# EAGLE board Proyecto01 (EAGLE 9.7.0)

Size 103.36 x 82.4 mm. Coordinates in mm from the lower left corner, seen from the top.
Outline: 0,0 103.36,0 103.36,82.4 0,82.4 0,0
Copper layers (1*16): Top 0.035mm / dielectric 1.5mm / Bottom 0.035mm
Design rules "default": minimum track width 6mil, minimum drill 0.35mm, track to track 6mil, track to pad 6mil, pad to pad 6mil, via to via 6mil, smd to smd 6mil, copper to edge 40mil, drill to drill 6mil, minimum pad ring 10mil, minimum via ring 8mil, stop-mask expansion 4mil, vias tented up to drill 0mil, thermal gap 10mil

## Footprints (pad centres in the part's own frame; a part is rotated, then mirrored left to right if it is on the bottom)
LEDRD254W60D565H860B = drill 0.981 pad 1.581: 1 -1.27,0; 2 1.27,0
RESAD1016W63L850D250B = drill 0.83 pad 1.43: 1 -5.08,0; 2 5.08,0
SWITCH-MOMENTARY-PTH-6.5MM = drill 1.016 pad 1.88: 1 -3.251,2.261; 2 3.251,2.261; 3 -3.251,-2.261; 4 3.251,-2.261
ARDUINO-UNO-R3-SHIELD = drill 1.016 pad 1.88: 3.3V 24.13,-2.54; 5V 24.13,0; A0 24.13,12.7; A1 24.13,15.24; A2 24.13,17.78; A3 24.13,20.32; A4 24.13,22.86; A5 24.13,25.4; AREF -24.13,-13.97; D2 -24.13,20.32; D3 -24.13,17.78; D4 -24.13,15.24; D5 -24.13,12.7; D6 -24.13,10.16; D7 -24.13,7.62; D8 -24.13,3.81; D9 -24.13,1.27; D10 -24.13,-1.27; D11 -24.13,-3.81; D12 -24.13,-6.35; D13 -24.13,-8.89; GND@0 24.13,2.54; GND@1 24.13,5.08; GND@2 -24.13,-11.43; IOREF 24.13,-7.62; NC 24.13,-10.16; RES 24.13,-5.08; RX -24.13,25.4; SCL -24.13,-19.05; SDA -24.13,-16.51; TX -24.13,22.86; VIN 24.13,7.62

## Placement (x,y rotation side)
DRED  RED  [LEDRD254W60D565H860B]  11.18,13.72 270 top
RR1  220  [RESAD1016W63L850D250B]  23.88,50.55 0 top
SP1  SWITCH_MOMENTARY  [SWITCH-MOMENTARY-PTH-6.5MM]  7.37,48.01 0 top
SP2  SWITCH_MOMENTARY  [SWITCH-MOMENTARY-PTH-6.5MM]  7.37,30.23 0 top
UUNO  ARDUINO-UNO-R3-SHIELD  [ARDUINO-UNO-R3-SHIELD]  73.51,34.52 180 top

## Library data of the parts
DRED = Tinkercad; CATEGORY: Opto-Electronic; SUB-CATEGORY: LED; VALUE: LED_RED
RR1 SP1 SP2 UUNO = Tinkercad

## Nets
SP1_2: RR1.1 SP1.1 SP1.2
SP1_3: SP1.3 SP1.4 SP2.1 SP2.2
SP2_3: DRED.1 SP2.3 SP2.4
UUNO_GND: DRED.2 RR1.2 UUNO.GND@0 UUNO.GND@1 UUNO.GND@2

## Tracks (layer width: path | path; a pad name or v marks a point on that pad's centre or on a via)
SP1_2  (2 unrouted)
SP1_3  (3 unrouted)
SP2_3  (2 unrouted)
UUNO_GND  (4 unrouted)